# Altium PCB QDSP-6064_0402LED.PcbDoc
Units mil, origin at the board's own origin, x right, y up, seen from the top; angles counter-clockwise.
Board outline 620 x 420 mil, 2 copper layers (F.Cu, B.Cu), stack 62.756 mil thick; 35 components, 12 nets, 76 pads, 33 vias.
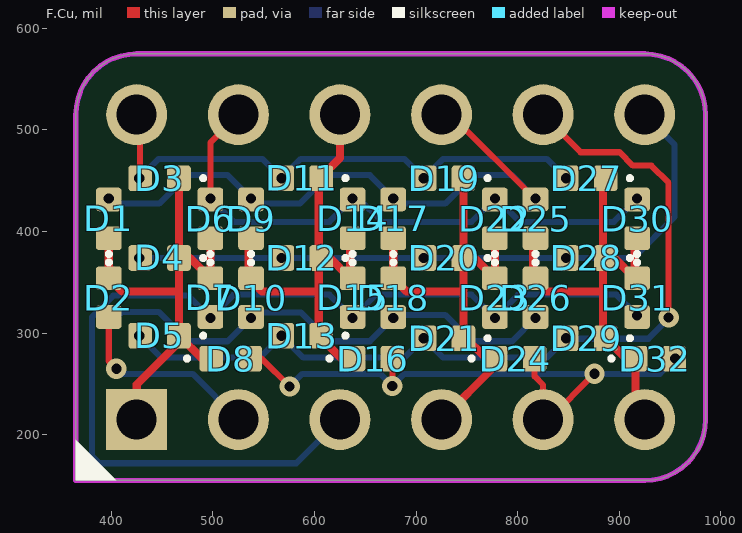
[diagram p0: F.Cu view]
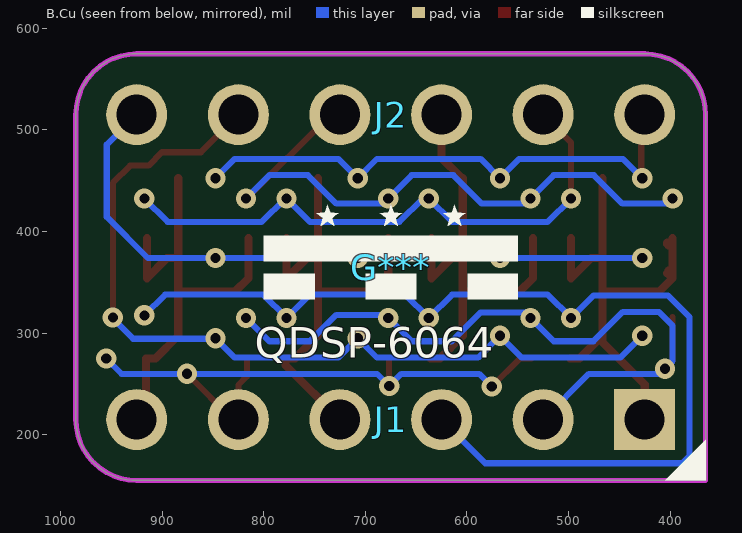
[diagram p1: B.Cu view, seen from below]

## Layer stack, top to bottom
F.Mask: solder mask 0.1, Solder Resist, Dk 1
F.Cu: signal copper 1.378
Dielectric 1: dielectric 60, FR-4, Dk 4.6
B.Cu: signal copper 1.378
B.Mask: solder mask 0.1, Solder Resist, Dk 1

## Board outline
365,155 365,515 cw(c425,515) 425,575 925,575 cw(c925,515) 985,515 985,215 cw(c925,215) 925,155

## Design rules (kind name [scope] priority, off if disabled: settings)
Clearance "Clearence 0.254_NetClass" [InNetClass('Default')] p1: gap=3 ignorepadtopadclearanceinfootprint=FALSE
HoleSize "Hole Size (Default)" [All] p1: absolutevalues=TRUE maxlimit=393.7 minlimit=10 maxpercent=80.000 minpercent=20.000
MinimumSolderMaskSliver [All] p1: minsoldermaskwidth=0
PolygonConnect [All] p1: connectstyle=Direct reliefconductorwidth=10 reliefentries=4 polygonreliefangle="90 Angle" airgapwidth=10
RoutingVias [All] p1: holewidth=28 width=50 viastyle="Through Hole" minholewidth=28 minwidth=50 maxholewidth=28 maxwidth=50
SilkToSilkClearance [All] p1: silktosilkclearance=0
SilkToSolderMaskClearance [IsPad] p1: minsilkscreentomaskgap=0 clearancetoexposedcopper=TRUE
SolderMaskExpansion [All] p1: expansion=4 istentingtop=FALSE
Width [All] p1: maxlimit=393.7 minlimit=6 preferedwidth=10 minimp=50.000000 maximp=50.000000 favimp=50.000000
26 further rules are at their usual default settings.

## Classes and differential pairs
net class Default: a b c C1 C2 C3 C4 d dp e f g

## Components (designator, comment, footprint, x,y, rotation, side; value= is the part's Value field where it differs from the comment)
D1 "LED" LED_0402_1005Metric 397.5,412.5 r90 top
D2 "LED" LED_0402_1005Metric 397.5,335 r270 top
D3 "LED" LED_0402_1005Metric 447.5,452.5 r180 top
D4 "LED" LED_0402_1005Metric 447.5,374 r180 top
D5 "LED" LED_0402_1005Metric 447.5,297.5 r180 top
D6 "LED" LED_0402_1005Metric 497.5,412.5 r90 top
D7 "LED" LED_0402_1005Metric 497.5,335 r270 top
D8 "LED" LED_0402_1005Metric 517.5,275 r0 top
D9 "LED" LED_0402_1005Metric 537.5,412.5 r90 top
D10 "LED" LED_0402_1005Metric 537.5,335 r270 top
D11 "LED" LED_0402_1005Metric 587.5,452.5 r180 top
D12 "LED" LED_0402_1005Metric 587.5,374 r180 top
D13 "LED" LED_0402_1005Metric 587.5,297.5 r180 top
D14 "LED" LED_0402_1005Metric 637.5,412.5 r90 top
D15 "LED" LED_0402_1005Metric 637.5,335 r270 top
D16 "LED" LED_0402_1005Metric 657.5,275 r0 top
D17 "LED" LED_0402_1005Metric 677.5,412.5 r90 top
D18 "LED" LED_0402_1005Metric 677.5,335 r270 top
D19 "LED" LED_0402_1005Metric 727.5,452.5 r180 top
D20 "LED" LED_0402_1005Metric 727.5,374 r180 top
D21 "LED" LED_0402_1005Metric 727.5,295 r180 top
D22 "LED" LED_0402_1005Metric 777.5,412.5 r90 top
D23 "LED" LED_0402_1005Metric 777.5,335 r270 top
D24 "LED" LED_0402_1005Metric 797.5,275 r0 top
D25 "LED" LED_0402_1005Metric 817.5,412.5 r90 top
D26 "LED" LED_0402_1005Metric 817.5,335 r270 top
D27 "LED" LED_0402_1005Metric 867.5,452.5 r180 top
D28 "LED" LED_0402_1005Metric 867.5,374 r180 top
D29 "LED" LED_0402_1005Metric 867.5,295 r180 top
D30 "LED" LED_0402_1005Metric 917.5,412.5 r90 top
D31 "LED" LED_0402_1005Metric 917.5,335 r270 top
D32 "LED" LED_0402_1005Metric 935,275 r0 top
G*** "LOGO" DCelectronics_logo3 675,365 r0 bottom
J1 "Conn_01x06" PinHeader_1x06_P2.54mm_Vertical#1 425,215 r90 bottom
J2 "Conn_01x06" PinHeader_1x06_P2.54mm_Vertical#2 925,515 r270 bottom

## Footprints (in the part's own frame and the unit in brackets; to place one, negate y for a bottom-side part, rotate by r counter-clockwise, add the part's x,y. Pads: shape width x height; smd on the part's side, far side on the other; paste and mask are expansions set on the pad)
DCelectronics_logo3 [mil]
  silkscreen extent -125,-62 125,32
LED_0402_1005Metric [mm]
  rrect25% 0.59x0.64 smd paste-0.051 mask+0.051: 1(-0.485,0) 2(0.485,0)
  silkscreen extent -1.14,-0.05 -1.04,0.05
PinHeader_1x06_P2.54mm_Vertical#1 [mil]
  rect 60x60 hole 39.37 paste-60 mask+2: 1(0,0)
  round 60 hole 39.37 paste-60 mask+2: 2(0,100) 3(0,200) 4(0,300) 5(0,400) 6(0,500)
PinHeader_1x06_P2.54mm_Vertical#2 [mil]
  round 60 hole 39.37 paste-60 mask+2: 1(0,0) 2(0,100) 3(0,200) 4(0,300) 5(0,400) 6(0,500)

## Part data
D1 D2 D3 D4 D5 D6 D7 D8 D9 D10 D11 D12 D13 D14 D15 D16 D17 D18 D19 D20 D21 D22 D23 D24 D25 D26 D27 D28 D29 D30 D31 D32: library part LED_0402_1005Metric, "LED SMD 0402 (1005 Metric), square (rectangular) end terminal, IPC_7351 nominal, (Body size source: http://www.tortai-tech.com/upload/download/2011102023233369053.pdf), generated with kicad-footprint-generator"
G***: library part DCelectronics_logo3
J1 J2: library part PinHeader_1x06_P2.54mm_Vertical, "Through hole straight pin header, 1x06, 2.54mm pitch, single row"

## Via types
v1: diameter 20, hole 10, F.Cu to B.Cu, tented both sides, 33 vias

## Nets (pads, with @x,y where several pads share a name; then routed paths per layer and width w, separated by ;. In a path a pad name is that pad's centre, name@x,y a point inside that pad or via, vN(x,y) a via of type N, cw(c..) or ccw(c..) an arc to the next point about the centre after c; other vN are vias at no path point)
a: D3.2 D11.2 D19.2 D27.2 J2.6 | length 531.1
  F.Cu w6: J2.6 428.41,511.59 D3.2
  B.Cu w6: v1(427.5,452.5) 446.5,471.5 548.5,471.5 v1(567.5,452.5) 586.5,471.5 688.5,471.5 v1(707.5,452.5) 726.5,471.5 828.5,471.5 v1(847.5,452.5)
b: D6.2 D14.2 D22.2 D30.2 J2.5 | length 572
  F.Cu w6: D6.2 497.5,487.5 J2.5
  B.Cu w6: v1(497.5,432.5) 520.5,409.5 614.5,409.5 v1(637.5,432.5) 643.46,432.5 666.46,409.5 754.5,409.5 v1(777.5,432.5) 779,432.5 802,409.5 894.5,409.5 v1(917.5,432.5)
c: D7.2 D15.2 D23.2 D31.2 J1.3 | length 1015.4
  B.Cu w6: 383.3,176.7 381,179 ; J1.3 582,172 388,172 381,179 ; v1(917.5,317.5) 897,338 800.5,338 v1(777.5,315) 754.5,338 660.5,338 v1(637.5,315) 614.5,338 520.5,338 v1(497.5,315) 475.5,337 401.94,337 381,316.06 381,179
C1: D1.1 D2.1 D3.1 D4.1 D5.1 D6.1 D7.1 D8.1 J1.1 | length 507.6
  F.Cu w8: D1.1 D2.1 ; D2.1@401.5,361.52 397.5,357.52 D2.1 ; D1.1@401.5,386.48 402.79,387.77 D1.1@402.79,389 ; D2.1@402.79,359 402.41,359 D2.1 ; J1.1 425,249.5 466.59,291.09 D5.1 ; D4.1 477.59,374 D7.1 D6.1 ; D3.1 466.59,340.91 ; D8.1 489.09,275 D5.1 ; D2.1 410.69,340.91 466.59,340.91 ; D5.1 466.59,340.91
C2: D9.1 D10.1 D11.1 D12.1 D13.1 D14.1 D15.1 D16.1 J2.4 | length 458.6
  F.Cu w8: D9.1@535,393.41 535,354.09 548.19,340.91 604.09,340.91 ; D12.1@604.09,374 615.09,374 635,354.09 D14.1@635,393.41 ; D11.1@604.09,452.5 604.09,340.91 ; D11.1 606.59,454.09 625,472.5 J2.4 ; D16.1@635.91,275 626.59,275 604.09,297.5 604.09,340.91
C3: D17.1 D18.1 D19.1 D20.1 D21.1 D22.1 D23.1 D24.1 J1.4 | length 470.6
  F.Cu w8: D17.1 D18.1 690.69,340.91 746.59,340.91 ; J1.4 778.41,268.41 D24.1 769.09,275 746.59,297.5 746.59,340.91 ; D20.1 757.59,374 D23.1 D22.1 ; D19.1 746.59,340.91
C4: D25.1 D26.1 D27.1 D28.1 D29.1 D30.1 D31.1 D32.1 J1.6 | length 452.2
  F.Cu w8: D25.1@815,393.41 815,354.09 828.19,340.91 884.09,340.91 ; D28.1@884.09,374 895.09,374 915,354.09 D30.1@915,393.41 ; D27.1@884.09,452.5 884.09,340.91 ; J1.6 915.91,224.09 D32.1 906.59,275 884.09,297.5 884.09,340.91
d: D5.2 D13.2 D21.2 D29.2 J2.2 | length 863.6
  F.Cu w6: J2.2 861.9,478.1 900.19,478.1 913.29,465 931.5,465 948.5,448 v1(948.5,315.5)
  B.Cu w6: v1(427.5,297.5) 449,276 546,276 v1(567.5,297.5) 589,276 688.5,276 v1(707.5,295) 726.5,276 828.5,276 v1(847.5,295) 848,294.5 928.54,294.5 v1@948.5,314.46
dp: D8.2 D16.2 D24.2 D32.2 J1.5 | length 611.9
  F.Cu w6: D8.2 548,275 v1(575.5,247.5) ; v1(676.5,248) 676.59,248.09 D16.2 ; D24.2@816.59,273.91 D24.2 816.59,257.41 825,249 J1.5 830.5,215 v1(875.5,260)
  B.Cu w6: v1(575.5,247.5) 588,260 664.5,260 v1(676.5,248) 688.5,260 940,260 v1(955,275)
e: D2.2 D10.2 D18.2 D26.2 J1.2 | length 736.9
  F.Cu w6: D2.2 397.5,272.5 v1(405,265)
  B.Cu w6: J1.2 480,260 410,260 397.5,272.5 397.5,307.5 411,321 446.5,321 475.5,292 514.5,292 v1(537.5,315) 543,320.5 586.5,320.5 615,292 654.5,292 v1(677.5,315) 680.5,318 728.5,318 754.5,292 794.5,292 v1(817.5,315) v1@820.5,318
f: D1.2 D9.2 D17.2 D25.2 J2.3 | length 616.6
  F.Cu w6: J2.3 734.09,515 D25.2
  B.Cu w6: v1(397.5,432.5) 402.5,427.5 447,427.5 475,455.5 514.5,455.5 v1(537.5,432.5) 542.5,427.5 585.5,427.5 613.5,455.5 654.5,455.5 v1(677.5,432.5) 682.5,427.5 728.5,427.5 756.5,455.5 794.5,455.5 v1(817.5,432.5)
g: D4.2 D12.2 D20.2 D28.2 J2.1 | length 656.5
  B.Cu w6: v1(427.5,374) v1(847.5,374) 914,374 954.5,414.5 954.5,485.5 J2.1
  other v1: 567.5,374 707.5,374

## Keep-outs
Edge.Cuts:
  the board outline again, w5

## Silkscreen, mask and mechanical layers (free items; w line width, h text height)
F.SilkS:
  region: 405,155 365,155 365,195
B.SilkS:
  region: 405,155 365,155 365,195
  text "QDSP-6064" at 809,276 h30
Margin:
  the board outline again, w5